# Altium PCB LineFollower.PcbDoc
Units mm, origin at the board's own origin, x right, y up, seen from the top; angles counter-clockwise.
Board outline 99.95 x 33.02 mm, 2 copper layers (Top Layer, Bottom Layer); 49 components, 29 nets, 172 pads, 0 vias.
Unrouted connection lines stored in the file: 118.
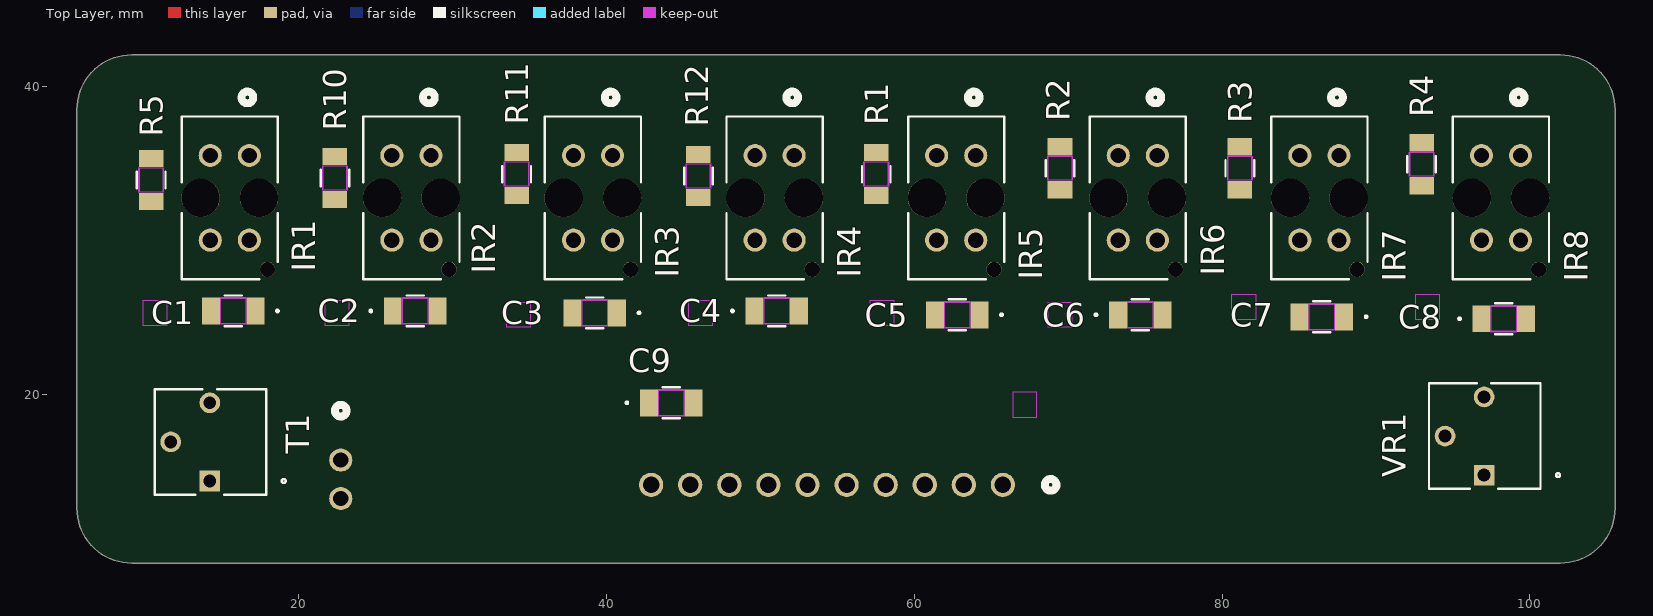
[diagram p0: Top Layer view]
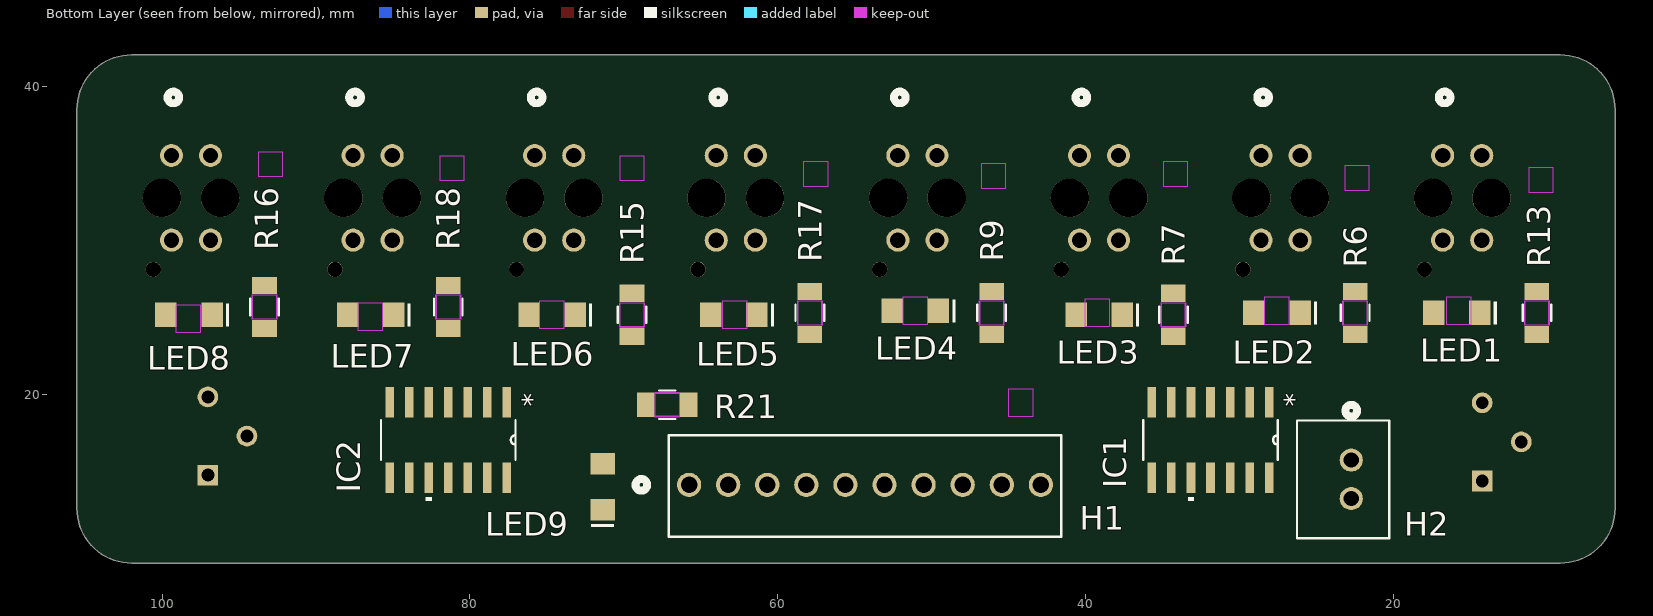
[diagram p1: Bottom Layer view, seen from below]

## Layer stack, top to bottom
Top Solder: solder mask 0.0102, Solder Resist, Dk 3.5
Top Layer: signal copper 0.0356
Dielectric 1: dielectric 0.32, FR-4, Dk 4.8
Bottom Layer: signal copper 0.0356
Bottom Solder: solder mask 0.0102, Solder Resist, Dk 3.5

## Board outline
9.144,9.017 cw(c9.144,12.573) 5.588,12.573 5.588,38.481 cw(c9.144,38.481) 9.144,42.037 101.981,42.037 cw(c101.981,38.481) 105.537,38.481 105.537,12.573 cw(c101.981,12.573) 101.981,9.017

## Design rules (kind name [scope] priority, off if disabled: settings)
Clearance [All] p1: gap=0.254 ignorepadtopadclearanceinfootprint=FALSE ismatrix=TRUE
PolygonConnect [All] p1: connectstyle=Relief reliefconductorwidth=0.254 reliefentries=4 polygonreliefangle="90 Angle" airgapwidth=0.254
RoutingVias [All] p1: holewidth=0.711 width=1.27 viastyle="Through Hole" minholewidth=0.711 minwidth=1.27 maxholewidth=0.711 maxwidth=1.27
SolderMaskExpansion [All] p1: expansion=0.102 istentingtop=FALSE
SupplyNets "Schematic Supply Nets_1" [InNet('GND')] p1: voltage=0.000
SupplyNets "Schematic Supply Nets" [InNet('VCC')] p2: voltage=0.000
Width [All] p1: maxlimit=0.254 minlimit=0.254 preferedwidth=0.254
30 further rules are at their usual default settings.

## Components (designator, comment, footprint, x,y, rotation, side; value= is the part's Value field where it differs from the comment)
C1 "1206Capacitor" CAP_1206_B_WAL 15.748,25.4 r180 top
C2 "1206Capacitor" CAP_1206_B_WAL 27.559,25.4 r0 top
C3 "1206Capacitor" CAP_1206_B_WAL 39.243,25.273 r180 top
C4 "1206Capacitor" CAP_1206_B_WAL 51.054,25.4 r0 top
C5 "1206Capacitor" CAP_1206_B_WAL 62.8,25.146 r180 top
C6 "1206Capacitor" CAP_1206_B_WAL 74.676,25.146 r0 top
C7 "1206Capacitor" CAP_1206_B_WAL 86.487,25.019 r180 top
C8 "1206Capacitor" CAP_1206_B_WAL 98.298,24.892 r0 top
C9 "1206Capacitor" CAP_1206_B_WAL 44.196,19.431 r0 top
H1 "10pinHeader" CONN_A-6373-10A_MOL 65.76,14.097 r180 bottom
H2 "2pinJST" CONN_B2B-XH-A_JST 22.733,15.708 r90 bottom
IC1 "LM339DR" D14 31.877,17.018 r270 bottom
IC2 "LM339DR" D14 81.407,17.018 r270 bottom
IR1 "TCRT5000L" TCRT5000_VIS 14.252,30 r90 top
IR2 "TCRT5000L" TCRT5000_VIS 26.052,30 r90 top
IR3 "TCRT5000L" TCRT5000_VIS 37.852,30 r90 top
IR4 "TCRT5000L" TCRT5000_VIS 49.652,30 r90 top
IR5 "TCRT5000L" TCRT5000_VIS 61.452,30 r90 top
IR6 "TCRT5000L" TCRT5000_VIS 73.252,30 r90 top
IR7 "TCRT5000L" TCRT5000_VIS 85.052,30 r90 top
IR8 "TCRT5000L" TCRT5000_VIS 96.852,30 r90 top
LED1 "Blue, 3.2V, 70°" WL-SMCW_1206_150120xx75000 15.875,25.273 r0 bottom
LED2 "Blue, 3.2V, 70°" WL-SMCW_1206_150120xx75000 27.559,25.273 r0 bottom
LED3 "Blue, 3.2V, 70°" WL-SMCW_1206_150120xx75000 39.116,25.146 r0 bottom
LED4 "Blue, 3.2V, 70°" WL-SMCW_1206_150120xx75000 51.054,25.4 r0 bottom
LED5 "Blue, 3.2V, 70°" WL-SMCW_1206_150120xx75000 62.852,25.146 r0 bottom
LED6 "Blue, 3.2V, 70°" WL-SMCW_1206_150120xx75000 74.652,25.146 r0 bottom
LED7 "Blue, 3.2V, 70°" WL-SMCW_1206_150120xx75000 86.452,25.146 r0 bottom
LED8 "Blue, 3.2V, 70°" WL-SMCW_1206_150120xx75000 98.252,25.146 r0 bottom
LED9 "Blue, 3.2V, 70°" WL-SMCW_1206_150120xx75000 71.374,13.97 r90 bottom
R1 "1206Resistor" RC1206N_YAG 57.531,34.29 r270 top
R2 "1206Resistor" RC1206N_YAG 69.469,34.671 r90 top
R3 "1206Resistor" RC1206N_YAG 81.153,34.671 r270 top
R4 "1206Resistor" RC1206N_YAG 92.964,34.925 r90 top
R5 "1206Resistor" RC1206N_YAG 10.414,33.909 r270 top
R6 "1206Resistor" RC1206N_YAG 22.479,25.273 r90 bottom
R7 "1206Resistor" RC1206N_YAG 34.29,25.146 r90 bottom
R9 "1206Resistor" RC1206N_YAG 46.101,25.273 r90 bottom
R10 "1206Resistor" RC1206N_YAG 22.352,34.036 r90 top
R11 "1206Resistor" RC1206N_YAG 34.163,34.29 r270 top
R12 "1206Resistor" RC1206N_YAG 45.974,34.163 r90 top
R13 "1206Resistor" RC1206N_YAG 10.668,25.273 r90 bottom
R15 "1206Resistor" RC1206N_YAG 69.469,25.146 r90 bottom
R16 "1206Resistor" RC1206N_YAG 93.345,25.654 r90 bottom
R17 "1206Resistor" RC1206N_YAG 57.912,25.273 r90 bottom
R18 "1206Resistor" RC1206N_YAG 81.407,25.654 r90 bottom
R21 "1206Resistor" RC1206N_YAG 67.183,19.304 r0 bottom
T1 "Trimmer" POT_3362P 14.224,14.351 r90 top
VR1 "Trimmer" POT_3362P 97.028,14.732 r90 top

## Footprints (in the part's own frame and the unit in brackets; to place one, negate y for a bottom-side part, rotate by r counter-clockwise, add the part's x,y. Pads: shape width x height; smd on the part's side, far side on the other; paste and mask are expansions set on the pad)
CAP_1206_B_WAL [mil]
  rect 46x69 smd paste+0 mask+0: 1(-57,0) 2(57,0)
  Top Layer keep-out region: -32,-32.5 -32,32.5 32,32.5 32,-32.5
  Keep-Out Layer region: -32,-34.5 -32,34.5 32,34.5 32,-34.5
  silkscreen extent -116,-40 22,40, body extent -66,-34 66,34, height 35
CONN_A-6373-10A_MOL [mil]
  round 62 / inner round 60 / far side round 62 hole 42 paste-99999 mask+0: 1(0,0) 2(100,0) 3(200,0) 4(300,0) 5(400,0) 6(500,0) 7(600,0) 8(700,0) 9(800,0) 10(900,0)
  silkscreen extent -137,-133 952,127
CONN_B2B-XH-A_JST [mil]
  round 59 / inner round 60 / far side round 59 hole 39 paste-99999 mask+0: 1(0,0) 2(-98.43,0)
  silkscreen extent -200,-97 141,139, body extent -195,-93 96,133, height 276
D14 [mil]
  rect 78x22 smd paste-39 mask-39: 1(-97,150) 2(-97,100) 3(-97,50) 4(-97,0) 5(-97,-50) 6(-97,-100) 7(-97,-150) 8(97,-150) 9(97,-100) 10(97,-50) 11(97,0) 12(97,50) 13(97,100) 14(97,150)
  silkscreen extent -51,-172 156,172, body extent -122,-172 122,172, height 69
POT_3362P [mil]
  rect 53x53 / inner round 60 / far side rect 53x53 hole 33 paste-99999 mask+0: 1(0,0)
  round 53 / inner round 60 / far side round 53 hole 33 paste-99999 mask+0: 2(100,100) 3(200,0)
  silkscreen extent -35,-194 235,141, body extent -30,-143 230,133, height 192
RC1206N_YAG [mil]
  rect 44x63 smd paste+0 mask+0: 1(-55,0) 2(55,0)
  Top Layer keep-out region: -31,-29.5 -31,29.5 31,29.5 31,-29.5
  Keep-Out Layer region: -31,-31.5 -31,31.5 31,31.5 31,-31.5
  silkscreen extent -21,-37 21,37, body extent -63,-31 63,31, height 28
TCRT5000_VIS [mil]
  round 59 / inner round 60 / far side round 59 hole 39 paste-99999 mask+0: 1(0,0) 2(0,-100) 3(216.54,0) 4(216.54,-100)
  round 98 / inner round 60 / far side round 98 hole 98 unplated paste-99999 mask-49: 5(108.27,24.8) 6(108.27,-124.8)
  round 39 / inner round 60 / far side round 39 hole 39 unplated paste-99999 mask-19.5: 7(-74.8,-146.46)
  silkscreen extent -100,-173 380,73, body extent -91,-192 311,80, height 256
WL-SMCW_1206_150120xx75000 [mm] "SMD Mono-color Chip LED, body 3.2x1.6mm"
  rect 1.4x1.6 smd: 1(-1.5,0) 2(1.5,0)
  silkscreen extent -2.6,-0.75 -2.4,0.75, body extent -1.6,-0.8 1.6,0.8, height 0.68

## Part data
C1 C3 C5 C7: "104", Mfr_Name=Walsin
C2 C4 C6 C8 C9: "No Description Available", Mfr_Name=Walsin
H1: "No Description Available", Mfr_Name="Molex Connector Corporation", RefDes=RefDes, TYPE=Type
H2: "No Description Available", Mfr_Name=JST, RefDes=RefDes, TYPE=Type
IC1 IC2: "No Description Available", Mfr_Name="Texas Instruments", RefDes=RefDes, TYPE=Type
IR1 IR2 IR3 IR4 IR5 IR6 IR7 IR8: "No Description Available", Mfr_Name=Vishay, RefDes=RefDes, TYPE=Type
LED1 LED2 LED3 LED4 LED5 LED6 LED7 LED8 LED9: library part 1206Led, "WL-SMCW Mono-color Chip LED Waterclear, SMT, size 1206, Blue, 3.2V, 70°", Case/Size Code=1206, Emitting Color=Blue, Forward Voltage=3.2V, Manufacturer="Wurth Elektronik", Manufacturer Part Number=150120BS87000, Operating Temperature Max=85°C, Operating Temperature Min=-40°C, Category="Signal LEDs", Chip Technology=InGaN, ComponentLink1Description="Website Link", ComponentLink1URL=https://www.we-online.com/redexpert/article/150120BS87000?ad, ComponentLink2Description="Datasheet Link", ComponentLink2URL=https://www.we-online.com/redexpert/spec/150120BS87000?ad, Dominant Wavelength=470nm, Height=1.1mm, Length=3.2mm, Luminous Intensity=300mcd, Match Code=WL-SMCW, Mount="Surface Mount", Packaging="Tape and Reel", Peak Wavelength=465nm, Viewing Angle=70°, Width=1.6mm
R1 R3 R5 R11: "10k", Mfr_Name=Yageo
R2 R4 R10 R12: "10K", Mfr_Name=Yageo
R6 R7 R9 R13 R15 R16 R17 R18: "1K", Mfr_Name=Yageo
R21: "No Description Available", Mfr_Name=Yageo
T1: "1K", Mfr_Name="Bourns Electronics"
VR1: "10k", Mfr_Name="Bourns Electronics"

## Nets (pads, with @x,y where several pads share a name; then routed paths per layer and width w, separated by ;. In a path a pad name is that pad's centre, name@x,y a point inside that pad or via, vN(x,y) a via of type N, cw(c..) or ccw(c..) an arc to the next point about the centre after c; other vN are vias at no path point)
control: H2.1 IR1.3 IR2.3 IR3.3 IR4.3 IR5.3 IR6.3 IR7.3 IR8.3 T1.2
D1: H1.2 IC1.1 R13.1
D2: H1.3 IC1.2 R6.1
D3: H1.4 IC1.14 R7.1
D4: H1.5 IC1.13 R9.1
D5: H1.6 IC2.1 R17.1
D6: H1.7 IC2.2 R15.1
D7: H1.8 IC2.14 R18.1
D8: H1.9 IC2.13 R16.1
GND: C1.1 C2.2 C3.1 C4.2 C5.1 C6.2 C7.1 C8.2 C9.1 H1.10 IC1.12 IC2.12 IR1.2 IR1.4 IR2.2 IR2.4 IR3.2 IR3.4 IR4.2 IR4.4 IR5.2 IR5.4 IR6.2 IR6.4 IR7.2 IR7.4 IR8.2 IR8.4 LED9.1 VR1.1
NetC1_2: C1.2 IC1.7 IR1.1 R5.2
NetC2_1: C2.1 IC1.5 IR2.1 R10.1
NetC3_2: C3.2 IC1.9 IR3.1 R11.2
NetC4_1: C4.1 IC1.11 IR4.1 R12.1
NetC5_2: C5.2 IC2.7 IR5.1 R1.2
NetC6_1: C6.1 IC2.5 IR6.1 R2.1
NetC7_2: C7.2 IC2.9 IR7.1 R3.2
NetC8_1: C8.1 IC2.11 IR8.1 R4.1
NetLED1_1: LED1.1 R13.2
NetLED2_1: LED2.1 R6.2
NetLED3_1: LED3.1 R7.2
NetLED4_1: LED4.1 R9.2
NetLED5_1: LED5.1 R17.2
NetLED6_1: LED6.1 R15.2
NetLED7_1: LED7.1 R18.2
NetLED8_1: LED8.1 R16.2
NetLED9_2: LED9.2 R21.2
Thresh: H2.2 IC1.4 IC1.6 IC1.8 IC1.10 IC2.4 IC2.6 IC2.8 IC2.10 VR1.2
VCC: C9.2 H1.1 IC1.3 IC2.3 LED1.2 LED2.2 LED3.2 LED4.2 LED5.2 LED6.2 LED7.2 LED8.2 R1.1 R2.2 R3.1 R4.2 R5.1 R10.2 R11.1 R12.2 R21.1 T1.3 VR1.3
pads on no net: IR1.5 IR1.6 IR1.7 IR2.5 IR2.6 IR2.7 IR3.5 IR3.6 IR3.7 IR4.5 IR4.6 IR4.7 IR5.5 IR5.6 IR5.7 IR6.5 IR6.6 IR6.7 IR7.5 IR7.6 IR7.7 IR8.5 IR8.6 IR8.7 T1.1

## Dimensions
9.144,9.017 to 9.144,42.037 on Bottom Layer
5.588,12.573 to 105.537,12.573 on Bottom Layer

## Text inside footprints (layer, text, board x,y; h text height)
IC1: Bottom Overlay "*" at 27.635,20.053 h1.27 r90; Mechanical 13 "*" at 27.635,20.053 h1.27 r90
IC2: Bottom Overlay "*" at 77.165,20.053 h1.27 r90; Mechanical 13 "*" at 77.165,20.053 h1.27 r90